# Altium PCB 400432.PcbDoc (part 3 of 7)
Units mm, origin at the board's own origin, x right, y up, seen from the top; angles counter-clockwise.
Board outline 136.53 x 63.5 mm, 4 copper layers (Top Layer, Mid-Layer 1, Mid-Layer 2, Bottom Layer), stack 1.505 mm thick; 354 components, 245 nets, 1470 pads, 1957 vias.
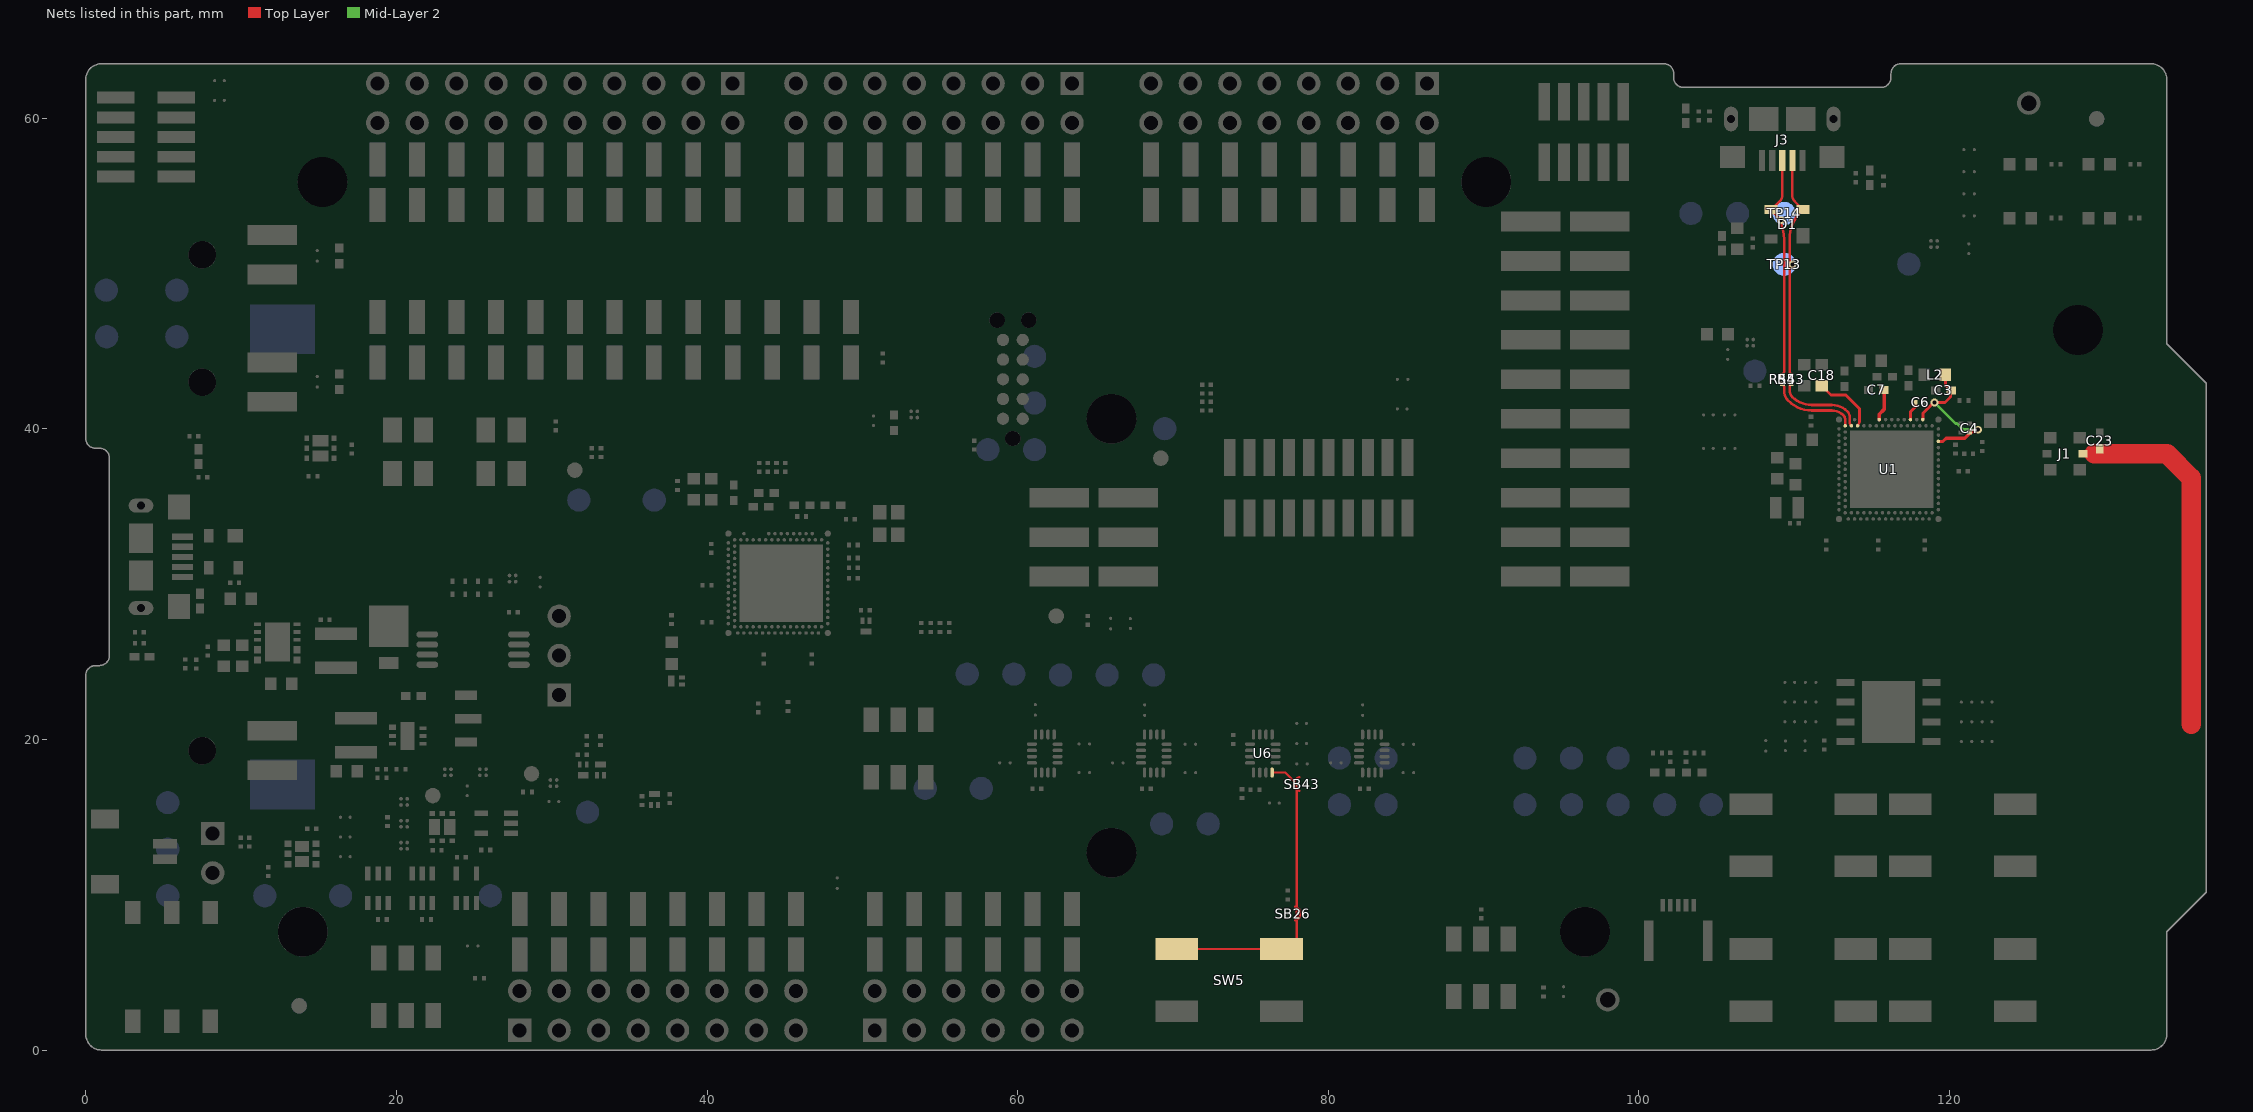
[diagram p4: the nets of this part, all layers, seen from the top]

## Part data (continued)
Q1 Q2: "N-Channel MOSFET, 20V, 1A, 470mOhm, 400mW", Manufacturer="Rohm Semiconductor", Part number IPS=00000009976, Part number Norautron=N.A., Supplier Part Number 1=RV2C010UNT2LCT-ND, Artikkelnr Noca=35010020, Author=rsk, Component Class=Semiconductors, ComponentLink1Description=Datasheet, ComponentLink1URL=N.A., ComponentLink2Description="Supplier link", ComponentLink2URL=N.A., Footprint Doc=DFN-3, HelpURL=http://rohmfs.rohm.com/en/products/databook/datasheet/discrete/transistor/mosfet/rv2c010unt2l-e.pdf, LatestRevisionDate=2016-08-09, Manufacturer Part Number=RV2C010UNT2L, Note=N.A., Pad Count=3, Part Number=RV2C010UNT2L, PartId=101300132, Published=2016-08-09, Supplier 1=Digi-Key, Supplier 2=Mouser, Supplier Part Number 2=755-RV2C010UNT2L
Q3 Q6 Q9: "N-Channel MOSFET, 20V, 1A, 470mOhm, 400mW", Manufacturer="Rohm Semiconductor", Part number IPS=00000009976, Supplier Part Number 1=RV2C010UNT2LCT-ND, Artikkelnr Noca=35010020, Component Class=Semiconductors, ComponentLink1Description=Datasheet, ComponentLink1URL=N.A., ComponentLink2Description="Supplier link", ComponentLink2URL=N.A., Footprint Doc=DFN-3, HelpURL=http://rohmfs.rohm.com/en/products/databook/datasheet/discrete/transistor/mosfet/rv2c010unt2l-e.pdf, LatestRevisionDate=2016-08-09, Manufacturer Part Number=RV2C010UNT2L, Note=N.A., Pad Count=3, Part Number=RV2C010UNT2L, PartId=101300132, Pin Count=3, Published=2016-08-09, Publisher="Nordic Semiconductor", Supplier 1=Digi-Key, Supplier 2=Mouser, Supplier Part Number 2=755-RV2C010UNT2L
Q5 Q10: library part PMCPB5530X,115, "Mosfet Array N and P-Channel 20V 4A (Ta), 3.4A (Ta) 490mW Surface Mount 6-HUSON-EP (2x2)", Manufacturer=Nexperia, Part number IPS=00000001918, Supplier Part Number 1=1727-1327-1-ND, Artikkelnr Noca=N.A., Component Class=Semiconductors, ComponentLink1Description=Datasheet, ComponentLink1URL=https://assets.nexperia.com/documents/data-sheet/PMCPB5530X.pdf, ComponentLink2Description="Supplier link", ComponentLink2URL=https://www.digikey.com/product-detail/en/nexperia-usa-inc/PMCPB5530X115/1727-1327-1-ND/4386339, Footprint Doc=6-UDFN, HelpURL=https://www.nexperia.com/products/mosfets/small-signal-mosfets/PMCPB5530X.html, LatestRevisionDate=2018-04-30, Manufacturer Part Number=PMCPB5530X,115, Note=N.A., Pad Count=8, Part Number=PMCPB5530X,115, PartId=101300165, Pin Count=8, Published=2018-04-30, Publisher="Nordic Semiconductor", Supplier 1=Digi-Key, Supplier 2=Mouser, Supplier Part Number 2=771-PMCPB5530X115
Q7: "45V NPN high gain power transistor", Manufacturer="Diodes Incorporated", Part number IPS=00000009974, Supplier Part Number 1=FCX690BCT-ND, Artikkelnr Noca=35010019, Component Class=Semiconductors, ComponentLink1Description=Datasheet, ComponentLink1URL=N.A., ComponentLink2Description="Supplier link", ComponentLink2URL=N.A., Footprint Doc=SOT-89, HelpURL=http://www.diodes.com/_files/datasheets/FCX690B.pdf, LatestRevisionDate=2016-07-07, Manufacturer Part Number=FCX690BTA, Note=N.A., Pad Count=3, Part Number=FCX690BTA, PartId=101300130, Pin Count=3, Published=2016-07-07, Publisher="Nordic Semiconductor", Supplier 1=Digi-Key, Supplier 2=N.A., Supplier Part Number 2=N.A.
Q8: "Dual N Ch MOFET, 5.8A, 55mOhm max, 620mW", Manufacturer="Taiwan Semiconductor", Part number IPS=00000001703, Supplier Part Number 1=TSM250N02DCQRFGCT-ND, Artikkelnr Noca=N.A., Component Class=Semiconductors, ComponentLink1Description=Datasheet, ComponentLink1URL=https://www.taiwansemi.com/products/datasheet/TSM250N02D_B15.pdf, ComponentLink2Description="Supplier link", ComponentLink2URL=N.A., Footprint Doc=VDFN-6, HelpURL=https://www.taiwansemi.com/products/datasheet/TSM250N02D_B15.pdf, LatestRevisionDate=2018-10-31, Manufacturer Part Number="TSM250N02DCQ RFG", Note=N.A., Pad Count=6, Part Number="TSM250N02DCQ RFG", PartId=101300161, Pin Count=6, Published=2018-10-31, Publisher="Nordic Semiconductor", Supplier 1=Digi-Key, Supplier 2=N.A., Supplier Part Number 2=N.A.
R1 R10: library part R0201-2R2, "Resistor, ±1%, 0.05W", Manufacturer=N.A., Artikkelnr Noca=N.A., Author=rsk, Component Class=Resistors, ComponentLink1Description=Datasheet, ComponentLink1URL=N.A., ComponentLink2Description="Supplier link", ComponentLink2URL=N.A., Footprint Doc=0201, HelpURL=N.A., LatestRevisionDate=2014-11-13, Manufacturer Part Number=N.A., Note="Chip Res 1%", Pad Count=2, Part Number=R0201-2R2, Part number IPS=N.A., Part number Norautron=N.A., PartId=100100006, Published=2014-11-13, Supplier 1=N.A., Supplier 2=N.A., Supplier Part Number 1=N.A., Supplier Part Number 2=N.A.
R2 R3 R4 R5: library part R0201-220, "Resistor, ±1%, 0.05W", Manufacturer=N.A., Part number IPS=00000000863, Artikkelnr Noca=N.A., Component Class=Resistors, ComponentLink1Description=Datasheet, ComponentLink1URL=N.A., ComponentLink2Description="Supplier link", ComponentLink2URL=N.A., Footprint Doc=0201, HelpURL=N.A., LatestRevisionDate=2014-11-13, Manufacturer Part Number=N.A., Note="Chip Res 1%", Pad Count=2, Part Number=R0201-220, PartId=100100032, Pin Count=2, Published=2014-11-13, Publisher="Nordic Semiconductor", Supplier 1=N.A., Supplier 2=N.A., Supplier Part Number 1=N.A., Supplier Part Number 2=N.A.
R6 R47 R71: library part R0201-100k, "Resistor, ±1%, 0.05W", Manufacturer=N.A., Part number IPS=00000001419, Artikkelnr Noca=N.A., Component Class=Resistors, ComponentLink1Description=Datasheet, ComponentLink1URL=N.A., ComponentLink2Description="Supplier link", ComponentLink2URL=N.A., Footprint Doc=0201, HelpURL=N.A., LatestRevisionDate=2014-11-13, Manufacturer Part Number=N.A., Note="Chip Res 1%", Pad Count=2, Part Number=R0201-100k, PartId=100100080, Pin Count=2, Published=2014-11-13, Publisher="Nordic Semiconductor", Supplier 1=N.A., Supplier 2=N.A., Supplier Part Number 1=N.A., Supplier Part Number 2=N.A.
R7: library part R0201-560, "Resistor, ±1%, 0.05W", Manufacturer=N.A., Artikkelnr Noca=N.A., Author=rsk, Component Class=Resistors, ComponentLink1Description=Datasheet, ComponentLink1URL=N.A., ComponentLink2Description="Supplier link", ComponentLink2URL=N.A., Footprint Doc=0201, HelpURL=N.A., LatestRevisionDate=2014-11-13, Manufacturer Part Number=N.A., Note="Chip Res 1%", Pad Count=2, Part Number=R0201-560, Part number IPS=N.A., Part number Norautron=N.A., PartId=100100038, Published=2014-11-13, Supplier 1=N.A., Supplier 2=N.A., Supplier Part Number 1=N.A., Supplier Part Number 2=N.A.
R8 R25 R51 R57 R68 R69 R72 R74: library part R0201-1M0, "Resistor, ±1%, 0.05W", Manufacturer=N.A., Part number IPS=00000001418, Artikkelnr Noca=N.A., Component Class=Resistors, ComponentLink1Description=Datasheet, ComponentLink1URL=N.A., ComponentLink2Description="Supplier link", ComponentLink2URL=N.A., Footprint Doc=0201, HelpURL=N.A., LatestRevisionDate=2014-11-13, Manufacturer Part Number=N.A., Note="Chip Res 1%", Pad Count=2, Part Number=R0201-1M0, PartId=100100093, Published=2014-11-13, Supplier 1=N.A., Supplier 2=N.A., Supplier Part Number 1=N.A., Supplier Part Number 2=N.A.
  R8 R51 R57 R68 R69 R72 R74: Pin Count=2, Publisher="Nordic Semiconductor"
  R25: Author=rsk, Part number Norautron=N.A.
R9 R13 R42 R45: library part R0201-N.C., "Not mounted", Manufacturer=N.A., Artikkelnr Noca=N.A., Assembly="Not mounted", Component Class=Resistors, ComponentLink1Description=Datasheet, ComponentLink1URL=N.A., ComponentLink2Description="Supplier link", ComponentLink2URL=N.A., Footprint Doc=0201, HelpURL=N.A., LatestRevisionDate=2014-11-13, Manufacturer Part Number=N.A., Note="Chip Res", Pad Count=2, Part Number=R0201-N.C., Part number IPS=N.A., PartId=100100107, Published=2014-11-13, Supplier 1=N.A., Supplier 2=N.A., Supplier Part Number 1=N.A., Supplier Part Number 2=N.A.
  R9 R13: Author=rsk, Part number Norautron=N.A.
  R42 R45: Pin Count=2, Publisher="Nordic Semiconductor"
R11: library part R0201-49R9, "Resistor, ±1%, 0.05W", Manufacturer=N.A., Artikkelnr Noca=N.A., Author=getr, Component Class=Resistors, ComponentLink1Description=Datasheet, ComponentLink1URL=N.A., ComponentLink2Description="Supplier link", ComponentLink2URL=N.A., Footprint Doc=0201, HelpURL=N.A., LatestRevisionDate=2021-04-15, Manufacturer Part Number=N.A., Note="Chip Res 1%", Pad Count=2, Part Number=R0201-49R9, Part number IPS=N.A., Part number Norautron=N.A., PartId=100100612, Published=2021-04-15, Supplier 1=N.A., Supplier 2=N.A., Supplier Part Number 1=N.A., Supplier Part Number 2=N.A.
R12 R50: library part R0201-47k, "Resistor, ±1%, 0.05W", Manufacturer=N.A., Part number IPS=00000001423, Artikkelnr Noca=N.A., Component Class=Resistors, ComponentLink1Description=Datasheet, ComponentLink1URL=N.A., ComponentLink2Description="Supplier link", ComponentLink2URL=N.A., Footprint Doc=0201, HelpURL=N.A., LatestRevisionDate=2014-11-13, Manufacturer Part Number=N.A., Note="Chip Res 1%", Pad Count=2, Part Number=R0201-47k, PartId=100100076, Published=2014-11-13, Supplier 1=N.A., Supplier 2=N.A., Supplier Part Number 1=N.A., Supplier Part Number 2=N.A.
  R50: Pin Count=2, Publisher="Nordic Semiconductor"
R14 R15 R16 R17 R19 R21 R22 R23: library part R0201-150, "Resistor, ±1%, 0.05W", Manufacturer=N.A., Part number IPS=00000001420, Artikkelnr Noca=N.A., Author=rsk, Component Class=Resistors, ComponentLink1Description=Datasheet, ComponentLink1URL=N.A., ComponentLink2Description="Supplier link", ComponentLink2URL=N.A., Footprint Doc=0201, HelpURL=N.A., LatestRevisionDate=2014-11-13, Manufacturer Part Number=N.A., Note="Chip Res 1%", Pad Count=2, Part Number=R0201-150, Part number Norautron=N.A., PartId=100100029, Published=2014-11-13, Supplier 1=N.A., Supplier 2=N.A., Supplier Part Number 1=N.A., Supplier Part Number 2=N.A.
R20 R24 R43 R46 R53 R54: library part R0201-0R, "Resistor, ±5%, 0.05W", Manufacturer=N.A., Part number IPS=00000003245, Artikkelnr Noca=N.A., Component Class=Resistors, ComponentLink1Description=Datasheet, ComponentLink1URL=N.A., ComponentLink2Description="Supplier link", ComponentLink2URL=N.A., Footprint Doc=0201, HelpURL=N.A., LatestRevisionDate=2017-11-09, Manufacturer Part Number=N.A., Note="Chip Res 5%", Pad Count=2, Part Number=R0201-0R, PartId=100100001, Pin Count=2, Published=2014-11-13, Publisher="Nordic Semiconductor", Supplier 1=N.A., Supplier 2=N.A., Supplier Part Number 1=N.A., Supplier Part Number 2=N.A.
R44 R55 R56 R77: library part R0201-10k, "Resistor, ±1%, 0.05W", Manufacturer=N.A., Part number IPS=00000001255, Artikkelnr Noca=N.A., Component Class=Resistors, ComponentLink1Description=Datasheet, ComponentLink1URL=N.A., ComponentLink2Description="Supplier link", ComponentLink2URL=N.A., Footprint Doc=0201, HelpURL=N.A., LatestRevisionDate=2014-11-13, Manufacturer Part Number=N.A., Note="Chip Res 1%", Pad Count=2, Part Number=R0201-10k, PartId=100100065, Pin Count=2, Published=2014-11-13, Publisher="Nordic Semiconductor", Supplier 1=N.A., Supplier 2=N.A., Supplier Part Number 1=N.A., Supplier Part Number 2=N.A.
R48 R49: library part R0201-4k7, "Resistor, ±1%, 0.05W", Manufacturer=N.A., Part number IPS=00000001706, Artikkelnr Noca=N.A., Component Class=Resistors, ComponentLink1Description=Datasheet, ComponentLink1URL=N.A., ComponentLink2Description="Supplier link", ComponentLink2URL=N.A., Footprint Doc=0201, HelpURL=N.A., LatestRevisionDate=2014-11-13, Manufacturer Part Number=N.A., Note="Chip Res 1%", Pad Count=2, Part Number=R0201-4k7, PartId=100100061, Pin Count=2, Published=2014-11-13, Publisher="Nordic Semiconductor", Supplier 1=N.A., Supplier 2=N.A., Supplier Part Number 1=N.A., Supplier Part Number 2=N.A.
R52: library part R0201-150k, "Resistor, ±1%, 0.05W", Manufacturer=N.A., Part number IPS=00000001422, Artikkelnr Noca=N.A., Component Class=Resistors, ComponentLink1Description=Datasheet, ComponentLink1URL=N.A., ComponentLink2Description="Supplier link", ComponentLink2URL=N.A., Footprint Doc=0201, HelpURL=N.A., LatestRevisionDate=2014-11-13, Manufacturer Part Number=N.A., Note="Chip Res 1%", Pad Count=2, Part Number=R0201-150k, PartId=100100082, Pin Count=2, Published=2014-11-13, Publisher="Nordic Semiconductor", Supplier 1=N.A., Supplier 2=N.A., Supplier Part Number 1=N.A., Supplier Part Number 2=N.A.
R58: library part R0201-1k0, "Resistor, ±1%, 0.05W", Manufacturer=N.A., Part number IPS=00000005786, Artikkelnr Noca=N.A., Component Class=Resistors, ComponentLink1Description=Datasheet, ComponentLink1URL=N.A., ComponentLink2Description="Supplier link", ComponentLink2URL=N.A., Footprint Doc=0201, HelpURL=N.A., LatestRevisionDate=2014-11-13, Manufacturer Part Number=N.A., Note="Chip Res 1%", Pad Count=2, Part Number=R0201-1k0, PartId=100100043, Pin Count=2, Published=2014-11-13, Publisher="Nordic Semiconductor", Supplier 1=N.A., Supplier 2=N.A., Supplier Part Number 1=N.A., Supplier Part Number 2=N.A.
R59: library part R0201-270k, "Resistor, ±1%, 0.05W", Manufacturer=N.A., Part number IPS=00000004317, Artikkelnr Noca=N.A., Component Class=Resistors, ComponentLink1Description=Datasheet, ComponentLink1URL=N.A., ComponentLink2Description="Supplier link", ComponentLink2URL=N.A., Footprint Doc=0201, HelpURL=N.A., LatestRevisionDate=2014-11-13, Manufacturer Part Number=N.A., Note="Chip Res 1%", Pad Count=2, Part Number=R0201-270k, PartId=100100086, Pin Count=2, Published=2014-11-13, Publisher="Nordic Semiconductor", Supplier 1=N.A., Supplier 2=N.A., Supplier Part Number 1=N.A., Supplier Part Number 2=N.A.
R60: library part R0201-330k, "Resistor, ±1%, 0.05W", Manufacturer=N.A., Part number IPS=00000001424, Artikkelnr Noca=N.A., Component Class=Resistors, ComponentLink1Description=Datasheet, ComponentLink1URL=N.A., ComponentLink2Description="Supplier link", ComponentLink2URL=N.A., Footprint Doc=0201, HelpURL=N.A., LatestRevisionDate=2014-11-13, Manufacturer Part Number=N.A., Note="Chip Res 1%", Pad Count=2, Part Number=R0201-330k, PartId=100100087, Pin Count=2, Published=2014-11-13, Publisher="Nordic Semiconductor", Supplier 1=N.A., Supplier 2=N.A., Supplier Part Number 1=N.A., Supplier Part Number 2=N.A.
R61 R70 R73: library part R0201-10M, "Resistor, ±1%, 0.05W", Manufacturer=N.A., Part number IPS=00000001426, Artikkelnr Noca=N.A., Component Class=Resistors, ComponentLink1Description=Datasheet, ComponentLink1URL=N.A., ComponentLink2Description="Supplier link", ComponentLink2URL=N.A., Footprint Doc=0201, HelpURL=N.A., LatestRevisionDate=2014-11-13, Manufacturer Part Number=N.A., Note="Chip Res 1%", Pad Count=2, Part Number=R0201-10M, PartId=100100105, Pin Count=2, Published=2014-11-13, Publisher="Nordic Semiconductor", Supplier 1=N.A., Supplier 2=N.A., Supplier Part Number 1=N.A., Supplier Part Number 2=N.A.
R62: library part R0201-30k, "Resistor, ±1%, 0.05W", Manufacturer=N.A., Part number IPS=00000004318, Artikkelnr Noca=N.A., Component Class=Resistors, ComponentLink1Description=Datasheet, ComponentLink1URL=N.A., ComponentLink2Description="Supplier link", ComponentLink2URL=N.A., Footprint Doc=0201, HelpURL=N.A., LatestRevisionDate=2016-04-20, Manufacturer Part Number=N.A., Note="Chip Res 1%", Pad Count=2, Part Number=R0201-30k, PartId=100100564, Pin Count=2, Published=2016-04-20, Publisher="Nordic Semiconductor", Supplier 1=N.A., Supplier 2=N.A., Supplier Part Number 1=N.A., Supplier Part Number 2=N.A.
R63: library part R0201-120k, "Resistor, ±1%, 0.05W", Manufacturer=N.A., Part number IPS=00000001425, Artikkelnr Noca=N.A., Component Class=Resistors, ComponentLink1Description=Datasheet, ComponentLink1URL=N.A., ComponentLink2Description="Supplier link", ComponentLink2URL=N.A., Footprint Doc=0201, HelpURL=N.A., LatestRevisionDate=2014-11-13, Manufacturer Part Number=N.A., Note="Chip Res 1%", Pad Count=2, Part Number=R0201-120k, PartId=100100081, Pin Count=2, Published=2014-11-13, Publisher="Nordic Semiconductor", Supplier 1=N.A., Supplier 2=N.A., Supplier Part Number 1=N.A., Supplier Part Number 2=N.A.
R64 R67: library part R0402-N.C., "Not mounted", Manufacturer=N.A., Artikkelnr Noca=N.A., Assembly="Not mounted", Component Class=Resistors, ComponentLink1Description=Datasheet, ComponentLink1URL=N.A., ComponentLink2Description="Supplier link", ComponentLink2URL=N.A., Footprint Doc=0402, HelpURL=N.A., LatestRevisionDate=2009-05-08, Manufacturer Part Number=N.A., Note="Chip Res", Pad Count=2, Part Number=R0402-N.C., Part number IPS=N.A., PartId=100100281, Pin Count=2, Published=2009-05-08, Publisher="Nordic Semiconductor", Supplier 1=N.A., Supplier 2=N.A., Supplier Part Number 1=N.A., Supplier Part Number 2=N.A.
R65: library part R0201-820k, "Resistor, ±1%, 0.05W", Manufacturer=N.A., Part number IPS=00000001427, Artikkelnr Noca=N.A., Component Class=Resistors, ComponentLink1Description=Datasheet, ComponentLink1URL=N.A., ComponentLink2Description="Supplier link", ComponentLink2URL=N.A., Footprint Doc=0201, HelpURL=N.A., LatestRevisionDate=2014-11-13, Manufacturer Part Number=N.A., Note="Chip Res 1%", Pad Count=2, Part Number=R0201-820k, PartId=100100092, Pin Count=2, Published=2014-11-13, Publisher="Nordic Semiconductor", Supplier 1=N.A., Supplier 2=N.A., Supplier Part Number 1=N.A., Supplier Part Number 2=N.A.
R66: library part R0201-470k, "Resistor, ±1%, 0.05W", Manufacturer=N.A., Part number IPS=00000001428, Artikkelnr Noca=N.A., Component Class=Resistors, ComponentLink1Description=Datasheet, ComponentLink1URL=N.A., ComponentLink2Description="Supplier link", ComponentLink2URL=N.A., Footprint Doc=0201, HelpURL=N.A., LatestRevisionDate=2014-11-13, Manufacturer Part Number=N.A., Note="Chip Res 1%", Pad Count=2, Part Number=R0201-470k, PartId=100100089, Pin Count=2, Published=2014-11-13, Publisher="Nordic Semiconductor", Supplier 1=N.A., Supplier 2=N.A., Supplier Part Number 1=N.A., Supplier Part Number 2=N.A.
R75: library part R0201-205, "Resistor, ±1%, 0.05W", Manufacturer=N.A., Artikkelnr Noca=N.A., Component Class=Resistors, ComponentLink1Description=Datasheet, ComponentLink1URL=N.A., ComponentLink2Description="Supplier link", ComponentLink2URL=N.A., Footprint Doc=0201, HelpURL=N.A., LatestRevisionDate=2019-07-16, Manufacturer Part Number=N.A., Note="Chip Res 1%", Pad Count=2, Part Number=R0201-205, Part number IPS=N.A., PartId=100100031, Pin Count=2, Published=2019-07-16, Publisher="Nordic Semiconductor", Supplier 1=N.A., Supplier 2=N.A., Supplier Part Number 1=N.A., Supplier Part Number 2=N.A.
R78: library part R0201-4R7, "Resistor, ±1%, 0.05W", Manufacturer=N.A., Part number IPS=00000002486, Artikkelnr Noca=N.A., Component Class=Resistors, ComponentLink1Description=Datasheet, ComponentLink1URL=N.A., ComponentLink2Description="Supplier link", ComponentLink2URL=N.A., Footprint Doc=0201, HelpURL=N.A., LatestRevisionDate=2014-11-13, Manufacturer Part Number=N.A., Note="Chip Res 1%", Pad Count=2, Part Number=R0201-4R7, PartId=100100010, Pin Count=2, Published=2014-11-13, Publisher="Nordic Semiconductor", Supplier 1=N.A., Supplier 2=N.A., Supplier Part Number 1=N.A., Supplier Part Number 2=N.A.
SB1 SB2 SB5 SB6 SB7 SB8 SB10 SB11 SB12 SB13 SB14 SB15 SB16 SB27 SB28 SB29 SB30 SB33 SB38 SB40 SB41 SB42 SB50 SB51 SB52 SB53 SB54 SB55 SB56 SB57 SB58 SB60: library part "Solderbridge Shorted", "Shorted Solderbridge", Manufacturer=N.A., Artikkelnr Noca=N.A., Component Class=Connectors, ComponentLink1Description=Datasheet, ComponentLink1URL=N.A., ComponentLink2Description="Supplier link", ComponentLink2URL=N.A., Footprint Doc=Solderbridge_Shorted, HelpURL=N.A., LatestRevisionDate=2012-08-07, Manufacturer Part Number=N.A., Note=N.A., Pad Count=2, Part Number="Solderbridge Shorted", Part number IPS=N.A., PartId=100500459, Pin Count=2, Published=2012-08-07, Publisher="Nordic Semiconductor", Supplier 1=N.A., Supplier 2=N.A., Supplier Part Number 1=N.A., Supplier Part Number 2=N.A.
SB3 SB4 SB9 SB17 SB18 SB19 SB20 SB21 SB22 SB23 SB24 SB25 SB26 SB31 SB32 SB34 SB35 SB36 SB37 SB39 SB43 SB44 SB45 SB46 SB47 SB48 SB59 SB80 SB81: Manufacturer=N.A., Artikkelnr Noca=N.A., Component Class=Connectors, ComponentLink1Description=Datasheet, ComponentLink1URL=N.A., ComponentLink2Description="Supplier link", ComponentLink2URL=N.A., Footprint Doc=Solderbridge, HelpURL=N.A., LatestRevisionDate=2009-12-14, Manufacturer Part Number=N.A., Note=N.A., Pad Count=2, Part Number=Solderbridge, Part number IPS=N.A., PartId=100500458, Pin Count=2, Published=2009-12-14, Publisher="Nordic Semiconductor", Supplier 1=N.A., Supplier 2=N.A., Supplier Part Number 1=N.A., Supplier Part Number 2=N.A.
SW1 SW2 SW3 SW4 SW5: library part Switch-PB-6.2x6.3mm-SMD, "Tactile Switch, SPNO, SMD, 160gf, 6.2x6.3x2.5mm", Manufacturer=Dailywell, Manufacturer Part Number=TS604VM1-025BR-R, Part number IPS=00000007812, Artikkelnr Noca=50019106, Component Class=Switches, ComponentLink1Description=Datasheet, ComponentLink1URL=N.A., ComponentLink2Description="Supplier link", ComponentLink2URL=N.A., Footprint Doc=Switch-PB-6.2x6.3mm-SMD, HelpURL=\\hizz\pro\app9717\Datasheet\switches\Dailywell\TS604VM1-025BR-R.pdf, LatestRevisionDate=2016-04-21, Note=N.A., Pad Count=4, Part Number=Switch-PB-6.2x6.3mm-SMD, PartId=101500001, Pin Count=4, Published=2010-02-01, Publisher="Nordic Semiconductor", Supplier 1=Cabcon, Supplier 2=Mouser, Supplier Part Number 1=TS604VM1-025BR-R, Supplier Part Number 2=688-SKHUALE010
SW6 SW10: "Slide Switch DPDT J Hook", Manufacturer="Copal Electronics Inc", Part number IPS=00000009983, Supplier Part Number 1=CAS220JTR-ND, Artikkelnr Noca=50019042, Component Class=Switches, ComponentLink1Description=Datasheet, ComponentLink1URL=N.A., ComponentLink2Description="Supplier link", ComponentLink2URL=N.A., Footprint Doc=CAS-220TA, HelpURL=http://media.digikey.com/pdf/Data%20Sheets/COPAL%20Electronics%20PDFs/CAS%20SMD%20Slide%20Switch.pdf, LatestRevisionDate=2010-02-18, Manufacturer Part Number=CAS-220TA, Note=N.A., Pad Count=6, Part Number=CAS-220TA, PartId=101500003, Pin Count=6, Published=2010-02-18, Publisher="Nordic Semiconductor", Supplier 1=Digi-Key, Supplier 2=N.A., Supplier Part Number 2=N.A.
SW7: library part CAS-D20TA, "SMD slide Switch 2xSPDT", Manufacturer="Copal Electronics Inc", Part number IPS=N.A., Supplier Part Number 1=CASD20JTR-ND, Artikkelnr Noca=N.A., Author=rsk, Component Class=Switches, ComponentLink1Description=Datasheet, ComponentLink1URL=N.A., ComponentLink2Description="Supplier link", ComponentLink2URL=N.A., Footprint Doc=CAS-D20A, HelpURL=http://copal-electronics.info/jp/0019b/cas_ja.pdf, LatestRevisionDate=2012-10-08, Manufacturer Part Number=CAS-D20TA, Note=N.A., Pad Count=6, Part Number=CAS-D20TA, Part number Norautron=N.A., PartId=101500004, Published=2012-10-08, Supplier 1=Digi-Key, Supplier 2=N.A., Supplier Part Number 2=N.A.
SW8: "Slide Switch DPDT", Manufacturer="HUA-JIE CORP.", Part number IPS=N.A., Artikkelnr Noca=N.A., Author=rsk, Component Class=Switches, ComponentLink1Description=Datasheet, ComponentLink1URL=N.A., ComponentLink2Description="Supplier link", ComponentLink2URL=N.A., Footprint Doc=MK-22D14-G2, HelpURL=N.A., LatestRevisionDate=2020-10-06, Manufacturer Part Number=MK-22D14-G2, Note=N.A., Pad Count=6, Part Number=MK-22D14-G2, Part number Norautron=N.A., PartId=101500131, Published=2020-12-01, Supplier 1=Cabcon, Supplier 2=N.A., Supplier Part Number 1=MK-22D14-G2, Supplier Part Number 2=N.A.
SW9: "Slide Switch DP3T 300mA 6V", Manufacturer=C&K, Part number IPS=00000004321, Supplier Part Number 1=CKN10725CT-ND, Artikkelnr Noca=50019116, Component Class=Switches, ComponentLink1Description=Datasheet, ComponentLink1URL=N.A., ComponentLink2Description="Supplier link", ComponentLink2URL=N.A., Footprint Doc=Switch-Slide-J-Lead-DP3T-13x3.5mm, HelpURL=http://www.ckswitches.com/media/1422/js.pdf, LatestRevisionDate=2016-10-05, Manufacturer Part Number=JS203011JCQN, Note=N.A., Pad Count=8, Part Number=JS203011JCQN, PartId=101500099, Pin Count=8, Published=2016-10-05, Publisher="Nordic Semiconductor", Supplier 1=Digi-Key, Supplier 2=N.A., Supplier Part Number 2=N.A.
TP1 TP2 TP3 TP4 TP5 TP6 TP7 TP8 TP9 TP10 TP11 TP12 TP13 TP14 TP15 TP16 TP17 TP18 TP20 TP21 TP22 TP23 TP24 TP25 TP26 TP27 TP28 TP30 TP31 TP32 TP35 TP37 TP38 TP39 TP42 TP43 TP44 TP45 TP46 TP47 TP48 TP54 TP55 TP56 TP57: library part TP_SMD_Ø1.5MM, "1.5mm circular SMD testpad", Manufacturer="Nordic Semiconductor", Manufacturer Part Number=N.A., Artikkelnr Noca=N.A., Component Class=Connectors, ComponentLink1Description=Datasheet, ComponentLink1URL=N.A., ComponentLink2Description="Supplier link", ComponentLink2URL=N.A., Footprint Doc=TP_SMD_Ø1.5mm, HelpURL=N.A., LatestRevisionDate=2016-06-02, Note=N.A., Pad Count=1, Part Number=TP_SMD_Ø1.5MM, Part number IPS=N.A., PartId=100500477, Pin Count=1, Published=2016-06-02, Publisher="Nordic Semiconductor", Supplier 1=N.A., Supplier 2=N.A., Supplier Part Number 1=N.A., Supplier Part Number 2=N.A.
TP19 TP29 TP33 TP34 TP36: library part TP_SMD_Ø1.0MM, "1.0mm circular SMD testpad", Manufacturer="Nordic Semiconductor", Manufacturer Part Number=N.A., Artikkelnr Noca=N.A., Component Class=Connectors, ComponentLink1Description=Datasheet, ComponentLink1URL=N.A., ComponentLink2Description="Supplier link", ComponentLink2URL=N.A., Footprint Doc=TP_SMD_Ø1.0mm, HelpURL=N.A., LatestRevisionDate=2013-06-11, Note=N.A., Pad Count=1, Part Number=TP_SMD_Ø1.0MM, Part number IPS=N.A., PartId=100500475, Pin Count=1, Published=2013-06-11, Publisher="Nordic Semiconductor", Supplier 1=N.A., Supplier 2=N.A., Supplier Part Number 1=N.A., Supplier Part Number 2=N.A.
TP40 TP41: library part "Testpoint TH", "Testpoint, through hole", Manufacturer=N.A., Artikkelnr Noca=N.A., Component Class=Connectors, ComponentLink1Description=Datasheet, ComponentLink1URL=N.A., ComponentLink2Description="Supplier link", ComponentLink2URL=N.A., Footprint Doc=TESTPAD-TH, HelpURL=N.A., LatestRevisionDate=2009-12-12, Manufacturer Part Number=N.A., Note=N.A., Pad Count=1, Part Number="Testpoint TH", Part number IPS=N.A., PartId=100500464, Pin Count=1, Published=2009-12-12, Publisher="Nordic Semiconductor", Supplier 1=N.A., Supplier 2=N.A., Supplier Part Number 1=N.A., Supplier Part Number 2=N.A.
U1 U2: library part nRF5340-QKAAD0, "Multi-protocol Bluetooth Low Energy, IEEE 802.15.4, ANT and 2.4GHz proprietary system-on-chip", Manufacturer="Nordic Semiconductor", Part number IPS=N.A., Artikkelnr Noca=N.A., Author=rsk, Component Class=nRF_Devices, ComponentLink1Description=Datasheet, ComponentLink1URL=N.A., ComponentLink2Description="Supplier link", ComponentLink2URL=N.A., Footprint Doc=AQFN-98, HelpURL=N.A., LatestRevisionDate=2020-12-02, Manufacturer Part Number=nRF5340-QKAAD0, Note=N.A., Pad Count=98, Part Number=nRF5340-QKAAD0, Part number Norautron=N.A., PartId=102000216, Published=2020-12-02, Supplier 1="Nordic Semiconductor", Supplier 2=N.A., Supplier Part Number 1=nRF5340-QKAAD0, Supplier Part Number 2=N.A.
U3 U5 U6 U25: "Data / Audio Low-Voltage Dual DPDT Analog Switch", Manufacturer="ON Semiconductor", Part number IPS=00000009986, Supplier Part Number 1=FSA2466UMXCT-ND, Artikkelnr Noca=15070069, Component Class=Misc_ICs, ComponentLink1Description=Datasheet, ComponentLink1URL=N.A., ComponentLink2Description="Supplier link", ComponentLink2URL=N.A., Footprint Doc=UFQFN-16, HelpURL=https://www.onsemi.com/pub/Collateral/FSA2466-D.PDF, LatestRevisionDate=2019-05-15, Manufacturer Part Number=FSA2466UMX, Note=N.A., Pad Count=16, Part Number=FSA2466UMX, PartId=101900422, Pin Count=16, Published=2016-05-18, Publisher="Nordic Semiconductor", Supplier 1=Digi-Key, Supplier 2=Mouser, Supplier Part Number 2=512-FSA2466UMX
U4 U12 U13 U14 U15 U17 U19 U20 U22 U23: "1.0 A Load Switch IC with Slew Rate Control Driver in Ultra Small Package", Manufacturer=Toshiba, Manufacturer Part Number=TCK106AG,LF, Part number IPS=00000004390, Supplier Part Number 1=TCK106AGLFTR-ND, Artikkelnr Noca=N.A., Component Class=Misc_ICs, ComponentLink1Description=Datasheet, ComponentLink1URL=https://toshiba.semicon-storage.com/info/docget.jsp?did=30131&prodName=TCK106AG, ComponentLink2Description="Supplier link", ComponentLink2URL=N.A., Footprint Doc=WLCSP-4, HelpURL=N.A., LatestRevisionDate=2019-03-01, Note=N.A., Pad Count=4, Part Number=TCK106AG, PartId=101900575, Pin Count=4, Published=2019-02-17, Publisher="Nordic Semiconductor", Supplier 1=Digi-Key, Supplier 2=Mouser, Supplier Part Number 2=757-TCK106AGLF
U7: library part MX25R6435FZNIL0, "Ultra low power, 64M-bit, serial multi I/O flash memory", Manufacturer=Macronix, Part number IPS=00000004370, Part number Norautron=N.A., Artikkelnr Noca=15020015, Author=rsk, Component Class=Misc_ICs, ComponentLink1Description=Datasheet, ComponentLink1URL=N.A., ComponentLink2Description="Supplier link", ComponentLink2URL=N.A., Footprint Doc=WSON-8, HelpURL=https://www.macronix.com/Lists/Datasheet/Attachments/7913/MX25R6435F,%20Wide%20Range,%2064Mb,%20v1.5.pdf, LatestRevisionDate=2021-02-26, Manufacturer Part Number=MX25R6435FZNIL0, Note=N.A., Pad Count=8, Part Number=MX25R6435FZNIL0, PartId=101900438, Published=2016-06-29, Supplier 1=Future, Supplier 2=Arrow, Supplier Part Number 1=MX25R6435FZNIL0, Supplier Part Number 2=MX25R6435FZNIL0
U9: "Precision very low power CMOS dual operational amplifier", Manufacturer=STMicroelectronics, Part number IPS=00000009991, Supplier Part Number 1=497-8085-1-ND, Artikkelnr Noca=17010019, Component Class=Misc_ICs, ComponentLink1Description=Datasheet, ComponentLink1URL=N.A., ComponentLink2Description="Supplier link", ComponentLink2URL=N.A., Footprint Doc=TSSOP-8, HelpURL=http://www.st.com/content/ccc/resource/technical/document/datasheet/38/5b/ca/bd/c0/26/4a/34/CD00000880.pdf/files/CD00000880.pdf/jcr:content/translations/en.CD00000880.pdf, LatestRevisionDate=2016-07-07, Manufacturer Part Number=TS27L2IPT, Note=N.A., Pad Count=8, Part Number=TS27L2IPT, PartId=101900442, Pin Count=8, Published=2016-07-07, Publisher="Nordic Semiconductor", Supplier 1=Digi-Key, Supplier 2=N.A., Supplier Part Number 2=N.A.
U10: library part XC9131H05CDR-G, "1A Driver Transistor Built-In, Multi Functional Step-Up DC/DC Converter", Manufacturer="Torex Semiconductor", Part number IPS=00000009990, Supplier Part Number 1=XC9131H05CDR-G-ND, Artikkelnr Noca=17030086, Component Class=Misc_ICs, ComponentLink1Description=Datasheet, ComponentLink1URL=N.A., ComponentLink2Description="Supplier link", ComponentLink2URL=N.A., Footprint Doc=UFDFN-10, HelpURL=http://www.torexsemi.com/products/dcdc_converters/data/XC9131.pdf, LatestRevisionDate=2016-08-08, Manufacturer Part Number=XC9131H05CDR-G, Note=N.A., Pad Count=10, Part Number=XC9131H05CDR-G, PartId=101900205, Pin Count=10, Published=2016-08-08, Publisher="Nordic Semiconductor", Supplier 1=Digi-Key, Supplier 2=N.A., Supplier Part Number 2=N.A.
U11: library part XC9236D08CER-G, "600mA Driver Transistor Built-In, Synchronous Step-Down DC/DC Converters", Manufacturer="Torex Semiconductor", Part number IPS=00000004325, Supplier Part Number 1=865-XC9236D08CER-G, Artikkelnr Noca=17030085, Component Class=Misc_ICs, ComponentLink1Description=Datasheet, ComponentLink1URL=N.A., ComponentLink2Description="Supplier link", ComponentLink2URL=N.A., Footprint Doc=USP-6C, HelpURL=http://www.torexsemi.com/products/dcdc_converters/data/XC9235~37.pdf, LatestRevisionDate=2017-11-15, Manufacturer Part Number=XC9236D08CER-G, Note=N.A., Pad Count=6, Part Number=XC9236D08CER-G, PartId=101900207, Pin Count=6, Published=2017-11-15, Publisher="Nordic Semiconductor", Supplier 1=Mouser, Supplier 2=Digi-Key, Supplier Part Number 2=XC9236D08CER-G-ND
U16 U24: library part 74LVC1G08GW, "Single 2-Input AND Gate", Manufacturer="NXP Semiconductors", Part number IPS=00000009992, Supplier Part Number 1=568-1580-1-ND, Artikkelnr Noca=15049058, Component Class=Misc_ICs, ComponentLink1Description=Datasheet, ComponentLink1URL=N.A., ComponentLink2Description="Supplier link", ComponentLink2URL=N.A., Footprint Doc=SC70-5, HelpURL=http://www.nxp.com/documents/data_sheet/74LVC1G08.pdf, LatestRevisionDate=2016-10-18, Manufacturer Part Number=74LVC1G08GW, Note="Single 2-Input AND Gate", Pad Count=5, Part Number=74LVC1G08GW, PartId=101900155, Pin Count=5, Published=2016-10-18, Publisher="Nordic Semiconductor", Supplier 1=Digi-Key, Supplier 2=Farnell, Supplier Part Number 2=242-8299
U18 U21: library part 74LVC1G11GW, "Single 3-input AND gate", Manufacturer="NXP Semiconductors", Part number IPS=00000001430, Supplier Part Number 1=568-7757-1-ND, Artikkelnr Noca=15079348, Component Class=Misc_ICs, ComponentLink1Description=Datasheet, ComponentLink1URL=N.A., ComponentLink2Description="Supplier link", ComponentLink2URL=N.A., Footprint Doc=SC70-6, HelpURL=http://www.nxp.com/documents/data_sheet/74LVC1G11.pdf, LatestRevisionDate=2016-10-18, Manufacturer Part Number=74LVC1G11GW, Note="Single 3-input AND gate", Pad Count=6, Part Number=74LVC1G11GW, PartId=101900157, Pin Count=6, Published=2016-10-18, Publisher="Nordic Semiconductor", Supplier 1=Digi-Key, Supplier 2=Farnell, Supplier Part Number 2=243-8826
X1 X3: library part XTAL_SMD2016_32MHz_8pF_Golledge, "XTAL SMD 2016, 32MHz, Cl=8pF, Tol: ±10ppm, Stab: ±15ppm", Manufacturer=Golledge, Manufacturer Part Number=MP06003, Part number IPS=00000001431, Supplier Part Number 1=N.A., Artikkelnr Noca=22010050, Component Class=Oscillators, ComponentLink1Description=Datasheet, ComponentLink1URL=N.A., ComponentLink2Description="Supplier link", ComponentLink2URL=N.A., Footprint Doc=XTAL_2016, HelpURL=\\hizz\pro\app9717\Datasheet\crystals\Golledge\mp06003.pdf, LatestRevisionDate=2016-11-02, Note="XTAL SMD 32.000MHz", Pad Count=4, Part Number=XTAL_SMD2016_32MHz_8pF_Golledge, PartId=101600041, Published=2016-11-02, Supplier 1="Link Nordic", Supplier 2=N.A., Supplier Part Number 2=N.A.
X2: library part XTAL_SMD2012_32.768kHz_9pF_Golledge, "XTAL SMD 2012, 32.768kHz, 9pF, ±20ppm", Manufacturer=Golledge, Manufacturer Part Number=MP07668, Part number IPS=N.A., Artikkelnr Noca=N.A., Component Class=Oscillators, ComponentLink1Description=Datasheet, ComponentLink1URL=N.A., ComponentLink2Description="Supplier link", ComponentLink2URL=N.A., Footprint Doc=XTAL_2012, HelpURL=\\hizz\pro\app9717\Datasheet\crystals\Golledge\mp07668.pdf, LatestRevisionDate=2016-11-02, Note="XTAL SMD 32.768kHz", Pad Count=2, Part Number=XTAL_SMD2012_32.768kHz_9pF_Golledge, PartId=101600017, Pin Count=2, Published=2016-11-02, Publisher="Nordic Semiconductor", Supplier 1="Link Nordic", Supplier 2=N.A., Supplier Part Number 1=N.A., Supplier Part Number 2=N.A.

## Free pads (board coordinates)
  round 3.2 hole 3.2 unplated: 1(13.97,7.62) 1(15.24,55.88) 1(66.04,12.7) 1(66.04,40.64) 1(90.17,55.88) 1(96.52,7.62) 1(128.27,46.355)
  round 0.35 on Mech16: 1(15.062,38.252) 1(96.279,28.219) 1(97.917,28.219) 1(110.653,42.769) 1(113.278,34.589) 1(113.278,34.989) 1(113.278,35.389) 1(113.278,35.789) 1(113.278,36.189) 1(113.278,36.589) 1(113.278,36.989) 1(113.278,37.789) 1(113.278,38.189) 1(113.678,34.589) 1(114.078,34.589) 1(114.478,34.589) 1(114.878,34.589) 1(115.278,34.589) 1(115.678,34.589) 1(115.678,40.189) 1(116.078,34.589) 1(116.078,40.189) 1(116.278,40.589) 1(116.478,34.589) 1(116.478,40.189) 1(116.878,34.589) 1(116.878,40.189) 1(117.278,34.589) 1(117.278,40.189) 1(117.678,34.589) 1(117.678,40.189) 1(118.078,34.589) 1(118.478,34.589) 1(118.878,34.589)

## Via types
v1: diameter 0.5, hole 0.25, Top Layer to Bottom Layer, tented both sides, 1453 vias
v2: diameter 0.3, hole 0.1, Top Layer to Mid-Layer 1, tented top, 392 vias
v3: diameter 0.3, hole 0.1, Top Layer to Mid-Layer 1, tented both sides, 68 vias
v4: diameter 0.61, hole 0.305, Top Layer to Bottom Layer, tented both sides, 44 vias

## Nets (pads, with @x,y where several pads share a name; then routed paths per layer and width w, separated by ;. In a path a pad name is that pad's centre, name@x,y a point inside that pad or via, vN(x,y) a via of type N, cw(c..) or ccw(c..) an arc to the next point about the centre after c; other vN are vias at no path point)
ANT: C23.1 J1.3 | length 22.7
  Top Layer w1.27: 129.303,38.391 133.992,38.391 135.551,36.832 135.551,20.99
BOOT/RESET: SB26.1 SB43.1 SW5.2 U6.16 | length 19.9
  Top Layer w0.152: SW5.2@70.234,6.502 SW5.2@76.984,6.502 77.774,6.502 77.97,6.698 77.97,8.788 77.97,10.795 77.97,16.766 SB43.1@77.97,17.12 ; U6.16@76.385,17.866 77.224,17.866 77.822,17.268
D*_N: D1.2 J3.2 R53.2 TP13.1 | length 14.6
  Top Layer w0.165: R53.2@109.804,43.465 cw(c110.049,43.71) 109.703,43.71 109.703,50.578 109.703,52.205 cw(c112.243,52.205) 110.447,54.001 D1.2@110.556,54.11 110.021,54.645 cw(c110.38,55.005) 109.872,55.005 J3.2@109.872,57.515
  other v1: 109.88,50.578
D*_P: D1.3 J3.3 R54.2 TP14.1 | length 14.3
  Top Layer w0.165: D1.3@108.506,54.11 108.603,54.013 cw(c106.807,52.217) 109.347,52.217 109.347,43.71 cw(c109,43.71) R54.2@109.245,43.465 ; D1.3@108.529,54.1 109.075,54.646 ; 109.075,54.645 ccw(c108.716,55.005) 109.224,55.005 109.224,57.263 J3.3@109.229,57.268
  other v1: 109.144,53.426
D_N: R53.1 U1.B4 | length 5.7
  Top Layer w0.165: R53.1@109.804,42.895 ccw(c110.05,42.65) 109.703,42.65 109.703,42.443 ccw(c110.254,42.443) 109.864,42.053 ccw(c111.13,43.32) 111.13,41.529 112.421,41.529 cw(c112.421,40.133) 113.408,41.12 cw(c113.034,40.746) 113.563,40.746 113.563,40.465 ccw(c113.953,40.465) U1.B4@113.678,40.189
D_P: R54.1 U1.B2 | length 5.7
  Top Layer w0.165: R54.1@109.245,42.895 cw(c109,42.65) 109.347,42.65 109.347,42.443 ccw(c110.254,42.443) 109.613,41.802 ccw(c111.13,43.319) 111.13,41.173 112.421,41.173 cw(c112.421,40.133) 113.157,40.869 cw(c112.866,40.577) 113.278,40.577 U1.B2@113.278,40.189 U1.B2@113.284,40.195
DECA: C7.2 U1.A13 | length 4.1
  Top Layer w0.225: 115.478,40.939 U1.A13@115.478,40.589 115.478,40.939 ; 115.478,40.939 115.778,41.239 ; 115.478,40.939 115.778,41.239 ; 115.778,41.239 C7.2@115.778,42.494 115.778,41.239
DECN: C6.1 U1.A23 | length 2.5
  Top Layer w0.2: 117.478,41.101 U1.A23@117.478,40.589 117.478,41.101 ; 117.478,41.101 117.812,41.435 ; 117.478,41.101 117.812,41.435 ; 117.812,41.435 C6.1@117.812,41.689 117.812,41.435
DECR: C3.2 C4.1 L2.1 U1.A27 U1.G31 | length 15.1
  Top Layer w0.2: U1.A27@118.278,40.589 118.278,40.982 ; L2.1@119.728,43.464 119.728,42.814 C3.2@120.053,42.489 ; C3.2@120.103,42.439 120.09,42.451 C3.2@120.053,42.489 ; 118.278,40.982 v1@118.985,41.689 ; 118.278,40.982 v1@118.985,41.689 ; v1@118.985,41.689 119.703,41.689 ; v1@118.985,41.689 v1(119.028,41.689) 119.703,41.689 ; 119.578,39.189 U1.G31@119.278,39.189 119.578,39.189 ; 119.578,39.189 119.778,39.389 ; 119.578,39.189 119.778,39.389 ; 119.703,41.689 120.053,42.039 ; 119.703,41.689 120.053,42.039 ; 119.778,39.389 120.953,39.389 119.778,39.389 ; 120.053,42.039 C3.2@120.053,42.489 ; C4.1@121.393,39.804 120.978,39.389 C4.1@121.393,39.804 ; C4.1@121.393,39.804 121.618,39.804 C4.1@121.393,39.804
  Mid-Layer 2 w0.2: v1(119.028,41.689) 120.381,40.335 120.472,40.335 120.869,39.939 v1(121.828,39.939)
DECUSB: C18.1 U1.B6 | length 4.2
  Top Layer w0.187: C18.1@111.778,42.764 112.369,42.173 113.31,42.173 114.209,41.274 114.209,40.463 ; C18.1@112.078,42.764 C18.1@112.078,42.769 ; U1.B6@114.078,40.189 114.209,40.459